# Altium PCB pizerousbhub.PcbDoc
Units mil, origin at the board's own origin, x right, y up, seen from the top; angles counter-clockwise.
Board outline 2559.06 x 1181.1 mil, 2 copper layers (Top, Bottom), stack 61.811 mil thick; 37 components, 21 nets, 120 pads, 23 vias.
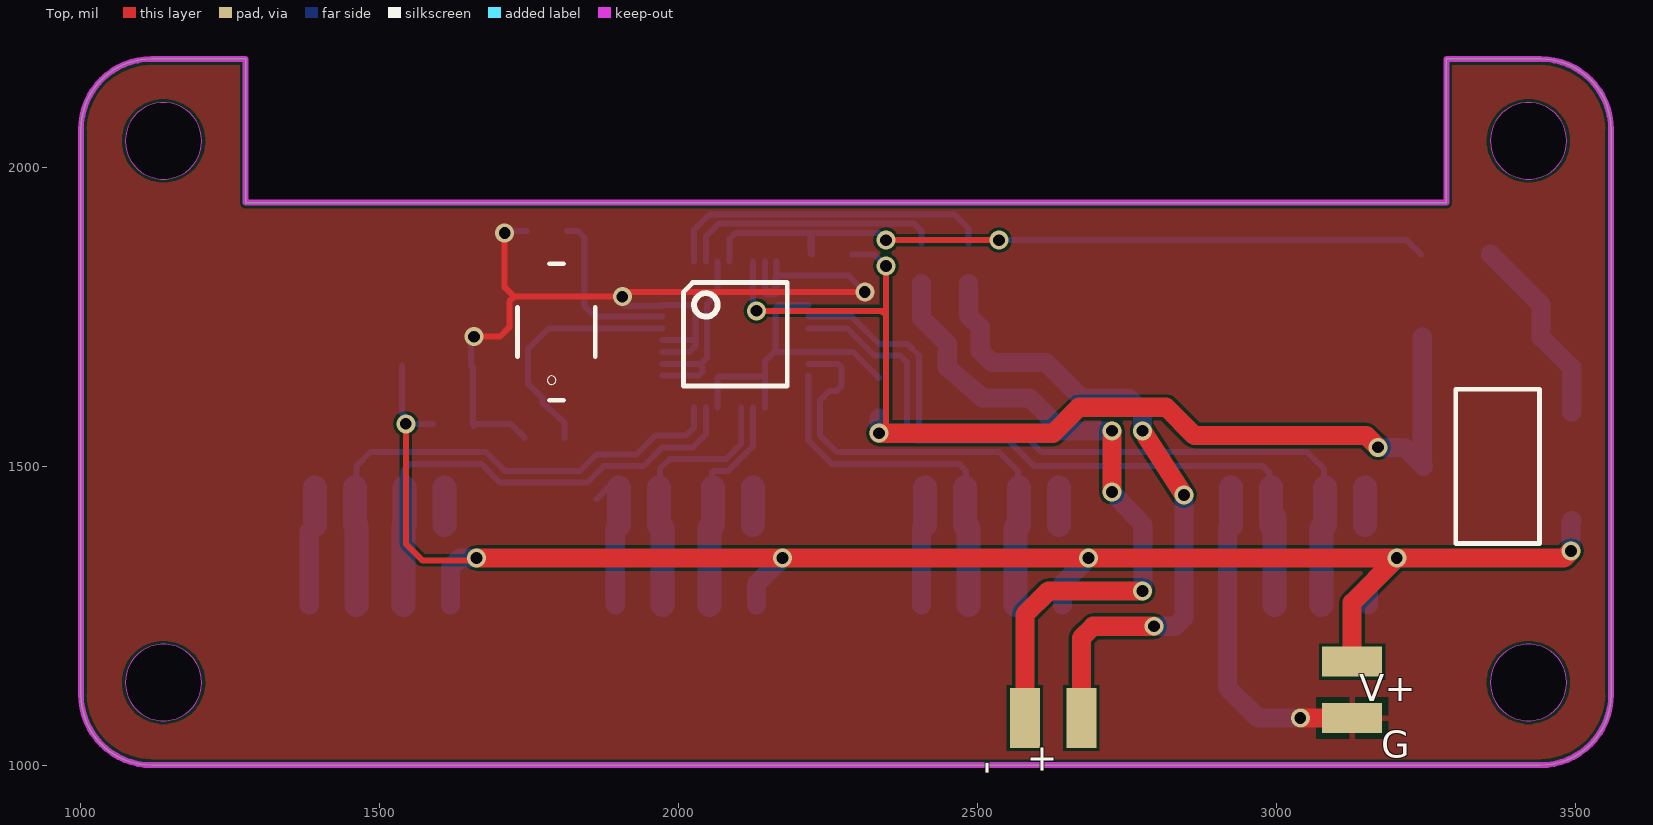
[diagram p0: Top view]
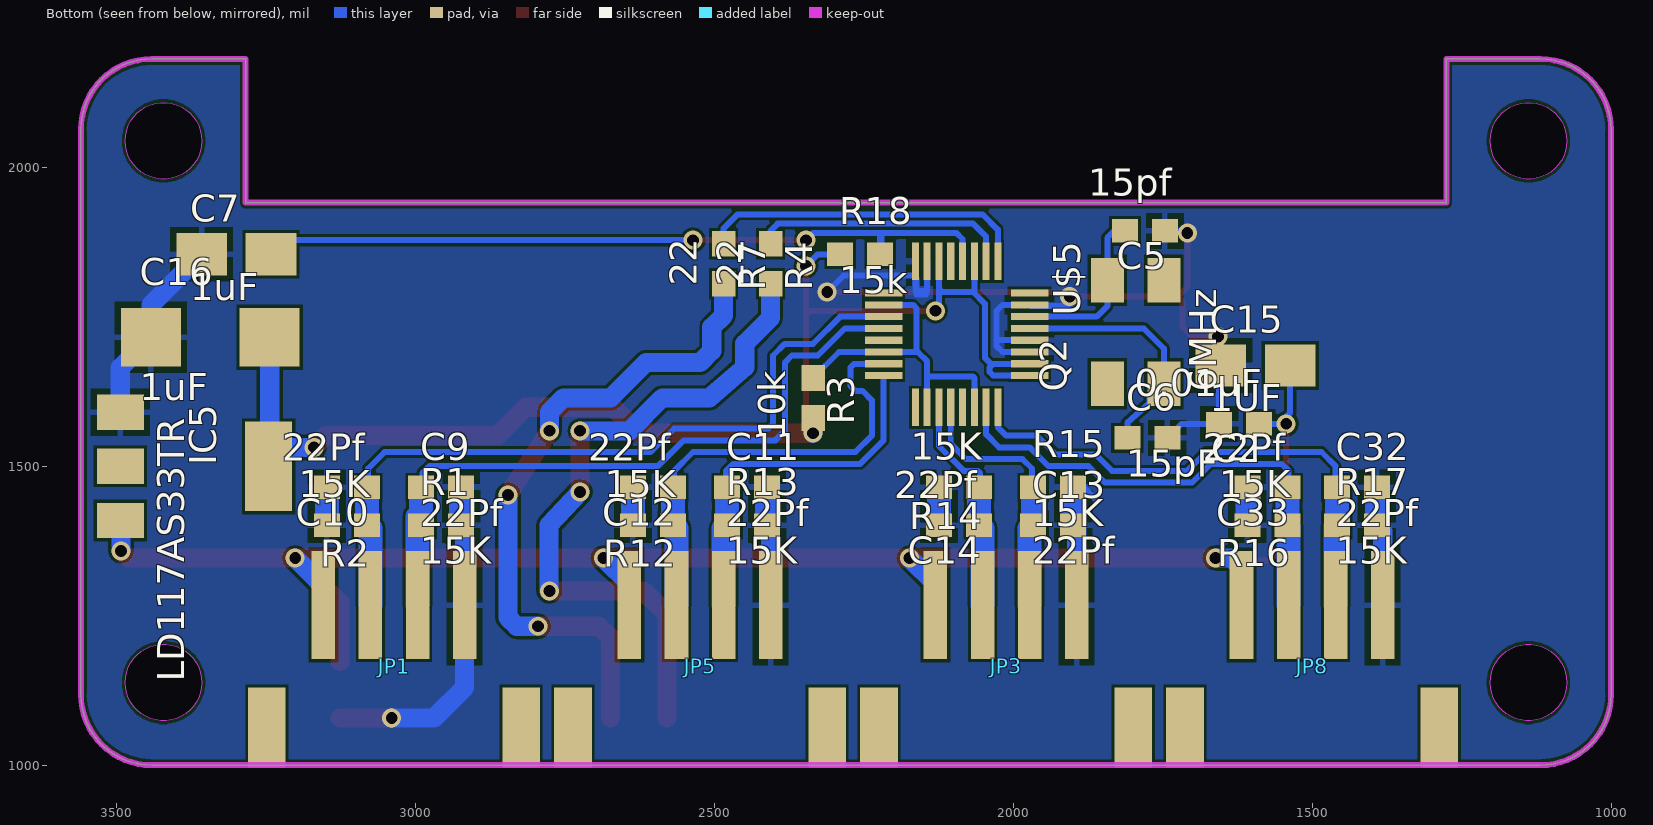
[diagram p1: Bottom view, seen from below]

## Layer stack, top to bottom
Top Solder: solder mask 0.4, Solder Resist, Dk 3.5
Top: signal copper 1.378
Dielectric 1: core 59.0551, FR-4, Dk 4.8
Bottom: signal copper 1.378
Bottom Solder: solder mask 0.4, Solder Resist, Dk 3.5

## Board outline
1118.11,1000 cw(c1118.11,1118.11) 1000,1118.11 1000,2062.99 cw(c1118.11,2062.99) 1118.11,2181.1 1275.59,2181.1 1275.59,1940.94 3283.46,1940.94 3283.46,2181.1 3440.94,2181.1 cw(c3440.95,2062.99) 3559.06,2062.99 3559.06,1118.11 cw(c3440.95,1118.12) 3440.94,1000
cut-out: 3484.85,1138.19 ccw(c3420.87,1138.19) 3356.89,1138.19 ccw(c3420.87,1138.19)
cut-out: 1202.17,1138.19 ccw(c1138.19,1138.19) 1074.21,1138.19 ccw(c1138.19,1138.19)
cut-out: 3484.85,2044.09 ccw(c3420.87,2044.09) 3356.89,2044.09 ccw(c3420.87,2044.09)
cut-out: 1202.17,2044.09 ccw(c1138.19,2044.09) 1074.21,2044.09 ccw(c1138.19,2044.09)

## Design rules (kind name [scope] priority, off if disabled: settings)
Clearance [All] p1: gap=5
Clearance "Clearance (Same Net)" [All] p2: gap=0
HoleSize HoleSize_1 [All] p1: absolutevalues=TRUE maxlimit=100000 minlimit=12 maxpercent=80.000 minpercent=20.000
HoleSize [All] p2: absolutevalues=TRUE maxlimit=100 minlimit=1 maxpercent=80.000 minpercent=20.000
HoleToHoleClearance mdViaViaSameLayer [All] p1: gap=8 allowstackedmicrovias=TRUE
HoleToHoleClearance [All] p2: gap=10 allowstackedmicrovias=TRUE
PasteMaskExpansion mlMinCreamFrame [All] p1: expansion=0
PasteMaskExpansion [All] p2: expansion=0
PolygonConnect ThermalVias [IsVia] p1: connectstyle=Direct reliefconductorwidth=10 reliefentries=4 polygonreliefangle="90 Angle" airgapwidth=10
PolygonConnect [All] p2: connectstyle=Relief reliefconductorwidth=10 reliefentries=4 polygonreliefangle="90 Angle" airgapwidth=10
RoutingVias [All] p1: holewidth=28 width=50 viastyle="Through Hole" minholewidth=28 minwidth=50 maxholewidth=28 maxwidth=50
SilkToSilkClearance [All] p1 off: silktosilkclearance=10
SilkToSolderMaskClearance [IsPad] p1 off: minsilkscreentomaskgap=10 clearancetoexposedcopper=TRUE
SolderMaskExpansion mlMinStopFrame [All] p1: expansion=2
SolderMaskExpansion [All] p2: expansion=4
Width Width_1 [All] p1: maxlimit=100000 minlimit=5 preferedwidth=10
Width [All] p2: maxlimit=10 minlimit=10 preferedwidth=10
25 further rules are at their usual default settings.

## Components (designator, comment, footprint, x,y, rotation, side; value= is the part's Value field where it differs from the comment)
+ "" SMD1,27-2,54 2673.23,1078.74 r0 top
- "" SMD1,27-2,54 2578.74,1078.74 r0 top
C2 "0.01uF" C0603 1622.05,1570.87 r0 bottom
C5 "15pf" C0603 1779.53,1893.7 r0 bottom
C6 "15pF" C0603 1775.59,1547.24 r180 bottom
C7 "1uF" A/3216-18W 3299.21,1854.33 r180 bottom
C9 "22Pf" C0603 2956.69,1464.57 r180 bottom
C10 "22Pf" C0603 3114.17,1464.57 r0 bottom
C11 "22Pf" C0603 2444.88,1464.57 r180 bottom
C12 "22Pf" C0603 2602.36,1464.57 r0 bottom
C13 "22Pf" C0603 1933.07,1401.57 r180 bottom
C14 "22Pf" C0603 2090.55,1401.57 r0 bottom
C15 "1UF" A/3216-18W 1594.69,1668.39 r180 bottom
C16 "1uF" C/6032-28R 3342.72,1715.63 r180 bottom
C32 "22Pf" C0603 1425.2,1464.57 r180 bottom
C33 "22Pf" C0603 1574.8,1464.57 r0 bottom
G "" SMD1,27-2,54 3125.98,1078.74 r90 top
IC5 "LD117AS33TR" SOT223 3369.17,1499.8 r270 bottom
JP1 "" S4B-PH 3035.43,1082.68 r0 bottom
JP3 "" S4B-PH 2011.81,1082.68 r0 bottom
JP5 "" S4B-PH 2523.62,1082.68 r0 bottom
JP8 "" S4B-PH 1500,1082.68 r0 bottom
Q2 "6MHz" CTS406 1795.28,1724.41 r90 bottom
R1 "15K" R0603 2956.69,1401.57 r180 bottom
R2 "15K" R0603 3114.17,1401.57 r0 bottom
R3 "10k" R0603 2334.65,1614.17 r270 bottom
R4 "22" R0603 2405.51,1838.58 r270 bottom
R7 "22" R0603 2484.25,1838.58 r270 bottom
R12 "15K" R0603 2602.36,1401.57 r0 bottom
R13 "15K" R0603 2444.88,1401.57 r180 bottom
R14 "15K" R0603 2090.55,1464.57 r0 bottom
R15 "15K" R0603 1933.07,1464.57 r180 bottom
R16 "15K" R0603 1574.8,1401.57 r0 bottom
R17 "15K" R0603 1425.2,1401.57 r180 bottom
R18 "15k" R0603 2255.91,1854.33 r180 bottom
U$5 "" LQFP-32 2094.49,1720.47 r0 bottom
V+ "" SMD1,27-2,54 3125.98,1173.23 r90 top

## Footprints (in the part's own frame and the unit in brackets; to place one, negate y for a bottom-side part, rotate by r counter-clockwise, add the part's x,y. Pads: shape width x height; smd on the part's side, far side on the other; paste and mask are expansions set on the pad)
A/3216-18W [mil] "A/3216-18W"
  rect 84.65x70.87 smd: +(58.07,0) -(-58.07,0)
C0603 [mm] "C0603"
  rect 1.1x1 smd: 1(-0.85,0) 2(0.85,0)
C/6032-28R [mm] "C/6032-28R"
  rect 2.55x2.5 smd: +(2.525,0) -(-2.525,0)
CTS406 [mil] "CTS406"
  rect 74.8x55.12 smd: 1(-86.61,-47.24) 2(86.61,-47.24) 3(86.61,47.24) 4(-86.61,47.24)
LQFP-32 [mil] "LQFP-32"
  rect 11.81x62.99 smd: 1(-68.9,-122.05) 2(-49.21,-122.05) 3(-29.53,-122.05) 4(-9.84,-122.05) 5(9.84,-122.05) 6(29.53,-122.05) 7(49.21,-122.05) 8(68.9,-122.05) 17(68.9,122.05) 18(49.21,122.05) 19(29.53,122.05) 20(9.84,122.05) 21(-9.84,122.05) 22(-29.53,122.05) 23(-49.21,122.05) 24(-68.9,122.05)
  rect 62.99x11.81 smd: 9(122.05,-68.9) 10(122.05,-49.21) 11(122.05,-29.53) 12(122.05,-9.84) 13(122.05,9.84) 14(122.05,29.53) 15(122.05,49.21) 16(122.05,68.9) 25(-122.05,68.9) 26(-122.05,49.21) 27(-122.05,29.53) 28(-122.05,9.84) 29(-122.05,-9.84) 30(-122.05,-29.53) 31(-122.05,-49.21) 32(-122.05,-68.9)
R0603 [mm] "R0603"
  rect 1.1x1 smd: 1(-0.85,0) 2(0.85,0)
S4B-PH [mm] "S4B-PH"
  rect 1x4.6 smd: 1(-3,-4.7) 2(-1,-4.7) 3(1,-4.7) 4(3,-4.7)
  rect 1.6x3.4 smd: P$1(-5.4,0.5) P$2(5.4,0.5)
SMD1,27-2,54 [mil] "SMD1,27-2,54"
  rect 50x100 smd: 1(0,0)
SOT223 [mm] "SOT223"
  rect 1.5x2 smd: 1(-2.3,-3.15) 2(0,-3.15) 3(2.3,-3.15)
  rect 3.8x2 smd: 4(0,3.15)

## Part data
+ - G V+: library part SMD1,27-2,54
C2 C5 C6 C9 C10 C11 C12 C13 C14 C32 C33: library part C0603
C7 C15: library part A/3216-18W
C16: library part C/6032-28R
IC5: library part SOT223
JP1 JP3 JP5 JP8: library part S4B-PH
Q2: library part CTS406
R1 R2 R3 R4 R7 R12 R13 R14 R15 R16 R17 R18: library part R0603
U$5: library part LQFP-32

## Via types
v1: diameter 31.69/31.69 (per signal layer), hole 19.69, Top to Bottom, 23 vias

## Nets (pads, with @x,y where several pads share a name; then routed paths per layer and width w, separated by ;. In a path a pad name is that pad's centre, name@x,y a point inside that pad or via, vN(x,y) a via of type N, cw(c..) or ccw(c..) an arc to the next point about the centre after c; other vN are vias at no path point)
3.3V: C16.+ IC5.4 R3.2 R18.1 U$5.3 U$5.6 U$5.25 U$5.26 | length 2366.8
  Top w10: v1(2129.92,1759.84) 2338.58,1759.84 2346.46,1751.97 ; v1(2334.65,1555.12) 2346.46,1566.93 2346.46,1751.97 ; v1(2346.46,1834.65) 2346.46,1751.97
  Top w32: v1(2334.65,1555.12) 2625.98,1555.12 2669.29,1598.43 2814.96,1598.43 2862.2,1551.18 3149.61,1551.18 v1(3169.29,1531.5)
  Bottom w10: U$5.25 2033.46,1651.57 2039.37,1657.48 2039.37,1665.35 2033.46,1671.26 U$5.26 2037.4,1671.26 2047.24,1681.1 2047.24,1771.65 2066.93,1791.34 ; U$5.3 2064.96,1793.31 2066.93,1791.34 ; v1(2129.92,1759.84) 2124.02,1765.75 U$5.6 2124.02,1797.24 2118.11,1791.34 2066.93,1791.34 ; R18.1 2326.77,1854.33 v1(2346.46,1834.65)
  Bottom w32: v1(2334.65,1555.12) R3.2 ; v1(3169.29,1531.5) 3213.46,1531.5 IC5.4 3243.31,1501.65 C16.+
+: +.1 R7.2 | length 1117.9
  Top w32: +.1 2673.23,1212.6 2692.91,1232.28 v1(2794.69,1232.28) ; v1(2775.59,1559.06) v1(2844.69,1451.57)
  Bottom w32: R7.2 2484.25,1751.97 2503.94,1732.28 2503.94,1692.91 2523.62,1673.23 2614.17,1673.23 2673.23,1614.17 2751.97,1614.17 2775.59,1590.55 v1(2775.59,1559.06) ; v1(2794.69,1232.28) 2830.12,1232.28 2844.69,1246.85 v1(2844.69,1451.57)
D-: -.1 R4.2 | length 1150.1
  Top w32: -.1 2578.74,1251.97 2618.11,1291.34 v1(2775.59,1291.34) ; v1(2724.41,1456.69) v1(2724.41,1559.06)
  Bottom w32: R4.2 2405.51,1748.03 2448.82,1704.72 2448.82,1665.35 2507.87,1614.17 2586.61,1614.17 2641.73,1559.06 v1(2724.41,1559.06) ; v1(2724.41,1456.69) 2775.98,1401.77 2775.98,1291.34 v1(2775.59,1291.34)
DM0: R4.1 U$5.2 | length 437.1
  Bottom w10: U$5.2 2045.28,1883.86 2066.93,1905.51 2393.7,1905.51 2405.51,1893.7 R4.1
DM1: C10.1 JP1.3 R2.1 U$5.11 | length 1265.9
  Bottom w10: U$5.11 2289.37,1750 2334.65,1704.72 2381.89,1704.72 2401.57,1685.04 2401.57,1570.87 2409.45,1562.99 2566.93,1562.99 2606.3,1523.62 3051.18,1523.62 3078.74,1496.06 3078.74,1466.54 C10.1
  Bottom w40: JP1.3 3074.8,1395.67 R2.1 C10.1
DM2: C12.1 JP5.3 R12.1 U$5.15 | length 776.2
  Bottom w10: U$5.15 2265.75,1671.26 2271.65,1665.35 2271.65,1633.86 2263.78,1625.98 2251.97,1625.98 2236.22,1610.24 2236.22,1551.18 2263.78,1523.62 2535.43,1523.62 2566.93,1492.13 2566.93,1466.54 C12.1
  Bottom w40: JP5.3 2562.99,1395.67 R12.1 C12.1
DM3: C14.1 JP3.3 R14.1 U$5.19 | length 376.4
  Bottom w10: R14.1 2055.12,1466.54 2055.12,1488.19 2059.06,1492.13 2082.68,1492.13 2124.02,1533.46 U$5.19
  Bottom w40: JP3.3 2051.18,1395.67 C14.1 R14.1
DM4: C33.1 JP8.3 R16.1 U$5.23 | length 828.6
  Bottom w10: C33.1 1539.37,1466.54 1539.37,1492.13 1551.18,1503.94 1669.29,1503.94 1700.79,1472.44 1846.46,1472.44 1874.02,1500 1940.94,1500 1972.44,1531.5 2023.62,1531.5 2045.28,1553.15 U$5.23
  Bottom w40: JP8.3 1539.37,1399.61 R16.1 C33.1
DP0: R7.1 U$5.1 | length 557.8
  Bottom w10: U$5.1 2025.59,1895.67 2051.18,1921.26 2460.63,1921.26 2484.25,1897.64 R7.1
DP1: C9.1 JP1.2 R1.1 U$5.12 | length 1182.2
  Bottom w10: U$5.12 2281.5,1730.32 2326.77,1685.04 2370.08,1685.04 2381.89,1673.23 2381.89,1559.06 2397.64,1543.31 2551.18,1543.31 2594.49,1500 2976.38,1500 2988.19,1488.19 2988.19,1466.54 C9.1
  Bottom w40: R1.1 2990.16,1421.26 ; C9.1 2990.16,1421.26 ; JP1.2 2996.06,1415.35 2990.16,1421.26
DP2: C11.1 JP5.2 R13.1 U$5.16 | length 620.9
  Bottom w10: U$5.16 2216.54,1543.31 2255.91,1503.94 2468.5,1503.94 2480.31,1492.13 2480.31,1466.54 C11.1@2478.35,1464.57
  Bottom w40: C11.1@2478.35,1464.57 2478.35,1401.57 2484.25,1395.67 JP5.2
DP3: C13.1 JP3.2 R15.1 U$5.20 | length 445.6
  Bottom w10: R15.1 1968.5,1466.54 1968.5,1496.06 1984.25,1511.81 2078.74,1511.81 2104.33,1537.4 U$5.20
  Bottom w40: R15.1 C13.1 1972.44,1395.67 JP3.2
DP4: C32.1 JP8.2 R17.1 U$5.24 | length 885.3
  Bottom w10: C32.1 1460.63,1466.54 1460.63,1500 1484.25,1523.62 1677.17,1523.62 1708.66,1492.13 1834.65,1492.13 1862.2,1519.69 1929.13,1519.69 1960.63,1551.18 2011.81,1551.18 2025.59,1564.96 U$5.24
  Bottom w40: C32.1 R17.1 1460.63,1399.61 JP8.2
G: C2.2 C5.1 C6.2 C7.- C9.2 C10.2 C11.2 C12.2 C13.2 C14.2 C15.- C16.- C32.2 C33.2 G.1 IC5.1 JP1.1 JP3.1 JP5.1 JP8.1 R1.2 R2.2 R12.2 R13.2 R14.2 R15.2 R16.2 R17.2 U$5.7 U$5.8 U$5.27 U$5.28 U$5.31 | length 3540.4
  Top w10: v1(1657.48,1716.54) 1700.79,1716.54 1716.54,1732.28 1716.54,1775.59 1724.41,1783.46 ; v1(1708.66,1889.76) 1708.66,1799.21 1724.41,1783.46 ; v1(2311.02,1791.34) 1909.45,1791.34 1905.51,1787.4 v1(1905.51,1783.46) 1724.41,1783.46
  Top w32: v1(3039.37,1078.74) G.1
  Bottom w10: C2.2@1657.48,1566.93 1655.51,1568.9 C2.2 ; v1(1657.48,1716.54) 1652.76,1711.81 C15.- 1655.51,1665.63 C2.2 ; v1(1708.66,1889.76) 1712.6,1893.7 C5.1 ; C6.2 1718.5,1570.87 C2.2 ; 1862.2,1444.88 1881.89,1464.57 R15.2 ; v1(1905.51,1783.46) 1905.51,1771.65 1909.45,1767.72 1970.47,1767.72 U$5.31 2017.72,1769.69 2027.56,1759.84 2027.56,1712.6 ; U$5.27 2017.72,1690.94 2027.56,1700.79 2027.56,1712.6 ; U$5.28 2025.59,1710.63 2027.56,1712.6 ; U$5.7 2143.7,1793.31 ; U$5.8 2163.39,1793.31 2161.42,1787.4 2145.67,1787.4 2143.7,1793.31 ; v1(2311.02,1791.34) 2283.46,1818.9 2165.35,1818.9 2161.42,1814.96 2161.42,1795.28 2159.45,1793.31 2143.7,1793.31
  Bottom w32: JP8.1 1381.89,1391.73 R17.2 ; JP3.1 1893.7,1395.67 C13.2 ; JP5.1 2405.51,1395.67 R13.2 ; R1.2 2917.32,1395.67 JP1.1 2917.32,1129.92 2968.5,1078.74 v1(3039.37,1078.74) ; C7.- 3442.13,1769.49 C16.- 3493.19,1664.57 IC5.1
  Bottom w40: R17.2 C32.2 ; R16.2 C33.2 ; C13.2 R15.2 ; C14.2 R14.2 ; R13.2 C11.2 ; R12.2 C12.2 ; R1.2 C9.2 ; R2.2 C10.2
N$3: R3.1 U$5.10 U$5.14 U$5.18 U$5.22 | length 553
  Bottom w10: U$5.22 2064.96,1647.64 2066.93,1649.61 2143.7,1649.61 ; U$5.18 2143.7,1649.61 ; U$5.10 2167.32,1769.69 2161.42,1763.78 2161.42,1694.88 2165.35,1690.94 ; R3.1 2291.34,1690.94 U$5.14 2165.35,1690.94 ; 2143.7,1649.61 2143.7,1675.2 2159.45,1690.94 2165.35,1690.94
N$52: 
RESET: C7.+ R18.2 U$5.4 | length 1284.6
  Top w10: v1(2346.46,1877.95) v1(2535.43,1877.95)
  Bottom w10: U$5.4 2084.65,1879.92 2094.49,1889.76 2220.47,1889.76 ; v1(2346.46,1877.95) 2334.65,1889.76 2220.47,1889.76 ; v1(2535.43,1877.95) 3217.52,1877.95 C7.+ ; 2220.47,1889.76 2220.47,1856.3 R18.2 2222.44,1883.86 2220.47,1889.76
VBB_IN: 
VUSB: C2.1 C15.+ IC5.3 JP1.4 JP3.4 JP5.4 JP8.4 V+.1 | length 3011.6
  Top w10: v1(1543.31,1570.87) 1543.31,1370.08 1570.87,1342.52 1657.48,1342.52 v1(1661.42,1346.46)
  Top w32: v1(1661.42,1346.46) v1(2173.23,1346.46) v1(2685.04,1346.46) v1(3200.79,1346.46) ; V+.1 3125.98,1271.65 v1(3200.79,1346.46) ; v1(3492.13,1358.27) 3480.32,1346.46 v1(3200.79,1346.46)
  Bottom w10: C15.+ 1536.61,1589.37 1555.12,1570.87 C2.1 v1(1543.31,1570.87)
  Bottom w32: JP8.4 1618.11,1330.71 1633.86,1346.46 v1(1661.42,1346.46) ; JP3.4 2129.92,1303.15 v1(2173.23,1346.46) ; JP5.4 2641.73,1303.15 v1(2685.04,1346.46) ; JP1.4 3153.54,1299.21 v1(3200.79,1346.46) ; v1(3492.13,1358.27) 3492.13,1408.19 IC5.3
XTAL1: C5.2 Q2.3 U$5.30 | length 285.9
  Bottom w10: C5.2 1830.71,1893.7 1842.52,1881.89 Q2.3 1842.52,1767.72 1860.24,1750 U$5.30
XTAL2: C6.1 Q2.1 U$5.29 | length 414.4
  Bottom w10: C6.1@1809.06,1547.24 1809.06,1572.83 1771.65,1606.3 1771.65,1614.17 Q2.1 1748.03,1696.85 1781.5,1730.32 U$5.29
pads on no net: IC5.2 JP1.P$1 JP1.P$2 JP3.P$1 JP3.P$2 JP5.P$1 JP5.P$2 JP8.P$1 JP8.P$2 Q2.2 Q2.4 U$5.5 U$5.9 U$5.13 U$5.17 U$5.21 U$5.32

## Polygon pours and split planes (outlines as drawn)
G on Bottom "Bottom-G" (solid, remove dead copper, pour order 0): 987.13,1000 987.13,2186.1 3571.93,2186.1 3571.93,975.31 987.13,975.31
G on Top "Top-G" (solid, remove dead copper, pour order 2): 981.76,2197.96 3577.29,2197.96 3577.29,981.76 981.76,981.76

## Keep-outs
Keep-Out Layer:
  the board outline again, w10

## Silkscreen, mask and mechanical layers (free items; w line width, h text height)
Dimension:
  circle w10: c1138.19,2044.09 r63.98
  circle w10: c3420.87,2044.09 r63.98
  circle w10: c3420.87,1138.19 r63.98
  circle w10: c1138.19,1138.19 r63.98
  lines w10: 1000,1118.11 ccw(c1118.11,1118.11) 1118.11,1000 3440.94,1000 ccw(c3440.95,1118.12) 3559.06,1118.11 3559.06,2062.99 ccw(c3440.95,2062.99) 3440.94,2181.1 3283.46,2181.1 3283.46,1940.94 1275.59,1940.94 1275.59,2181.1 1118.11,2181.1 ccw(c1118.11,2062.99) 1000,2062.99 1000,1118.11
topsilkoh:
  drawing of 1016 lines, arcs and shapes, not listed
  text "QR: PAYPAL LINK" at 1460.63,1537.4 h25.1 r90
  text "Support the developer" at 1048.98,1503.55 h20.08
  text "5V" at 3055.12,1200.79 h27.2
  text "D-" at 2543.31,1035.43 h27.2 r90
  text "D+" at 2740.16,1035.43 h27.2 r90
  text "GND" at 3086.61,1015.75 h27.2
BSILKOH:
  drawing of 1111 lines, arcs and shapes, not listed
  text "donate:" at 1206.65,1950.37 h27.2
  text "15K" at 2291.34,1881.89 h27.2
  text "15pF" at 1940.94,1877.95 h27.2
  text "1uF" at 3181.1,1842.52 h27.2
  text "PiZero USB Hub" at 3103.88,1781.53 h42.5
  text "10uF" at 3173.23,1700.79 h27.2
  text "22R" at 2389.76,1692.91 h27.2 r270
  text "22R" at 2468.5,1692.91 h27.2 r270
  text "1uF" at 1484.25,1649.61 h27.2
  text "12Mhz" at 1874.02,1622.05 h27.2 r270
  text "github.com/openhardwarecoza" at 3175.2,1621.85 h27.2
  text "10K" at 2362.2,1574.8 h27.2 r270
  text "15pF" at 1937.01,1531.5 h27.2
  text "TUSB2046" at 2248.03,1519.69 h27.2
  text "22pF" at 2669.29,1496.06 h27.2
  text "22pF" at 3157.48,1492.13 h27.2
  text "22pF" at 1366.14,1448.82 h27.2
  text "22pF" at 1736.22,1448.82 h27.2
  text "22pF" at 1870.08,1448.82 h27.2
  text "22pF" at 2248.03,1448.82 h27.2
  text "22pF" at 2381.89,1448.82 h27.2
  text "22pF" at 2893.7,1448.82 h27.2
  text "1117-3.3" at 3385.83,1389.76 h27.2 r270
  text "15K" at 1358.27,1385.83 h27.2
  text "15K" at 1720.47,1385.83 h27.2
  text "15K" at 1870.08,1385.83 h27.2
  text "15K" at 2240.16,1385.83 h27.2
  text "15K" at 2381.89,1385.83 h27.2
  text "15K" at 2744.09,1385.83 h27.2
  text "15K" at 2893.7,1385.83 h27.2
  text "15K" at 3255.91,1381.89 h27.2

## Text inside footprints (layer, text, board x,y; h text height)
IC5: Document "direction of pcb" at 3353.42,1484.05 h15.5 r90; Document "transportation for" at 3371.14,1484.05 h15.5 r90; Document "wavesoldering" at 3388.86,1484.05 h15.5 r90